# Allegro board MAIN.brd
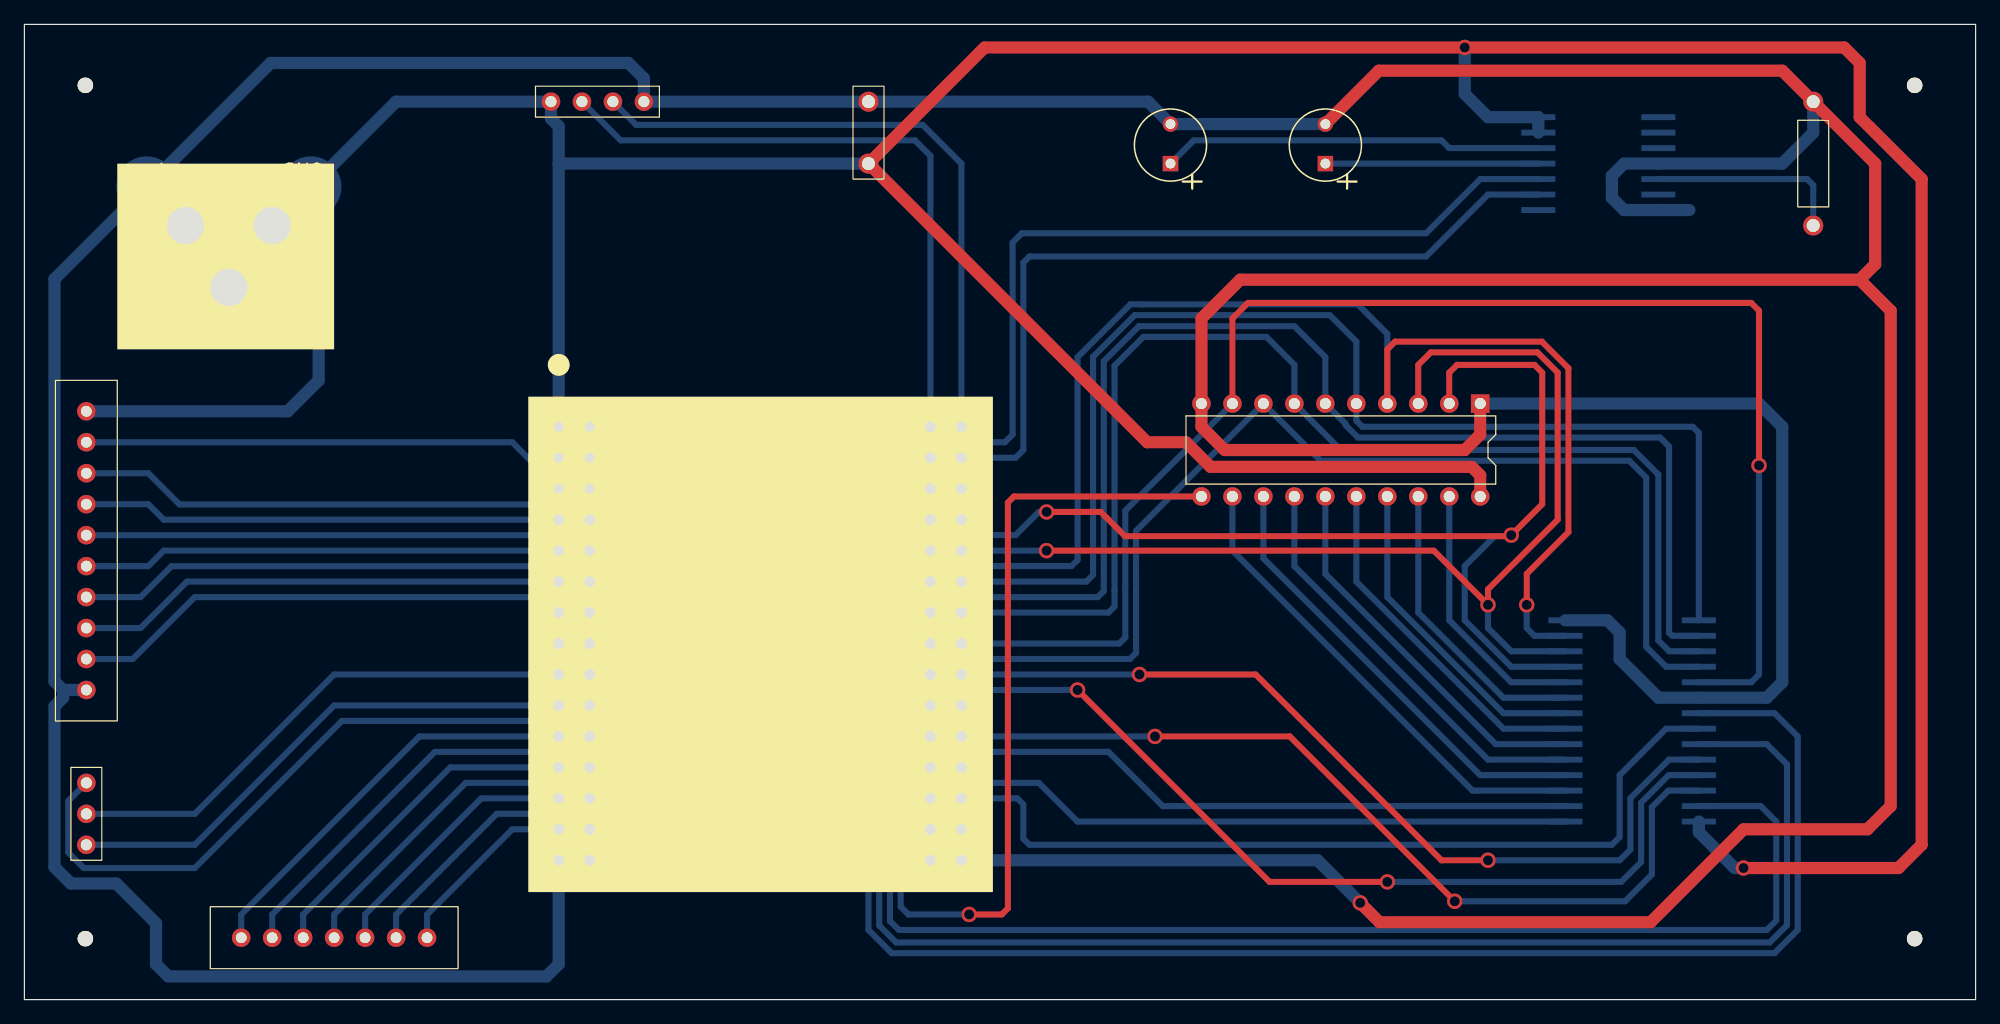
[diagram p0: board, top side]
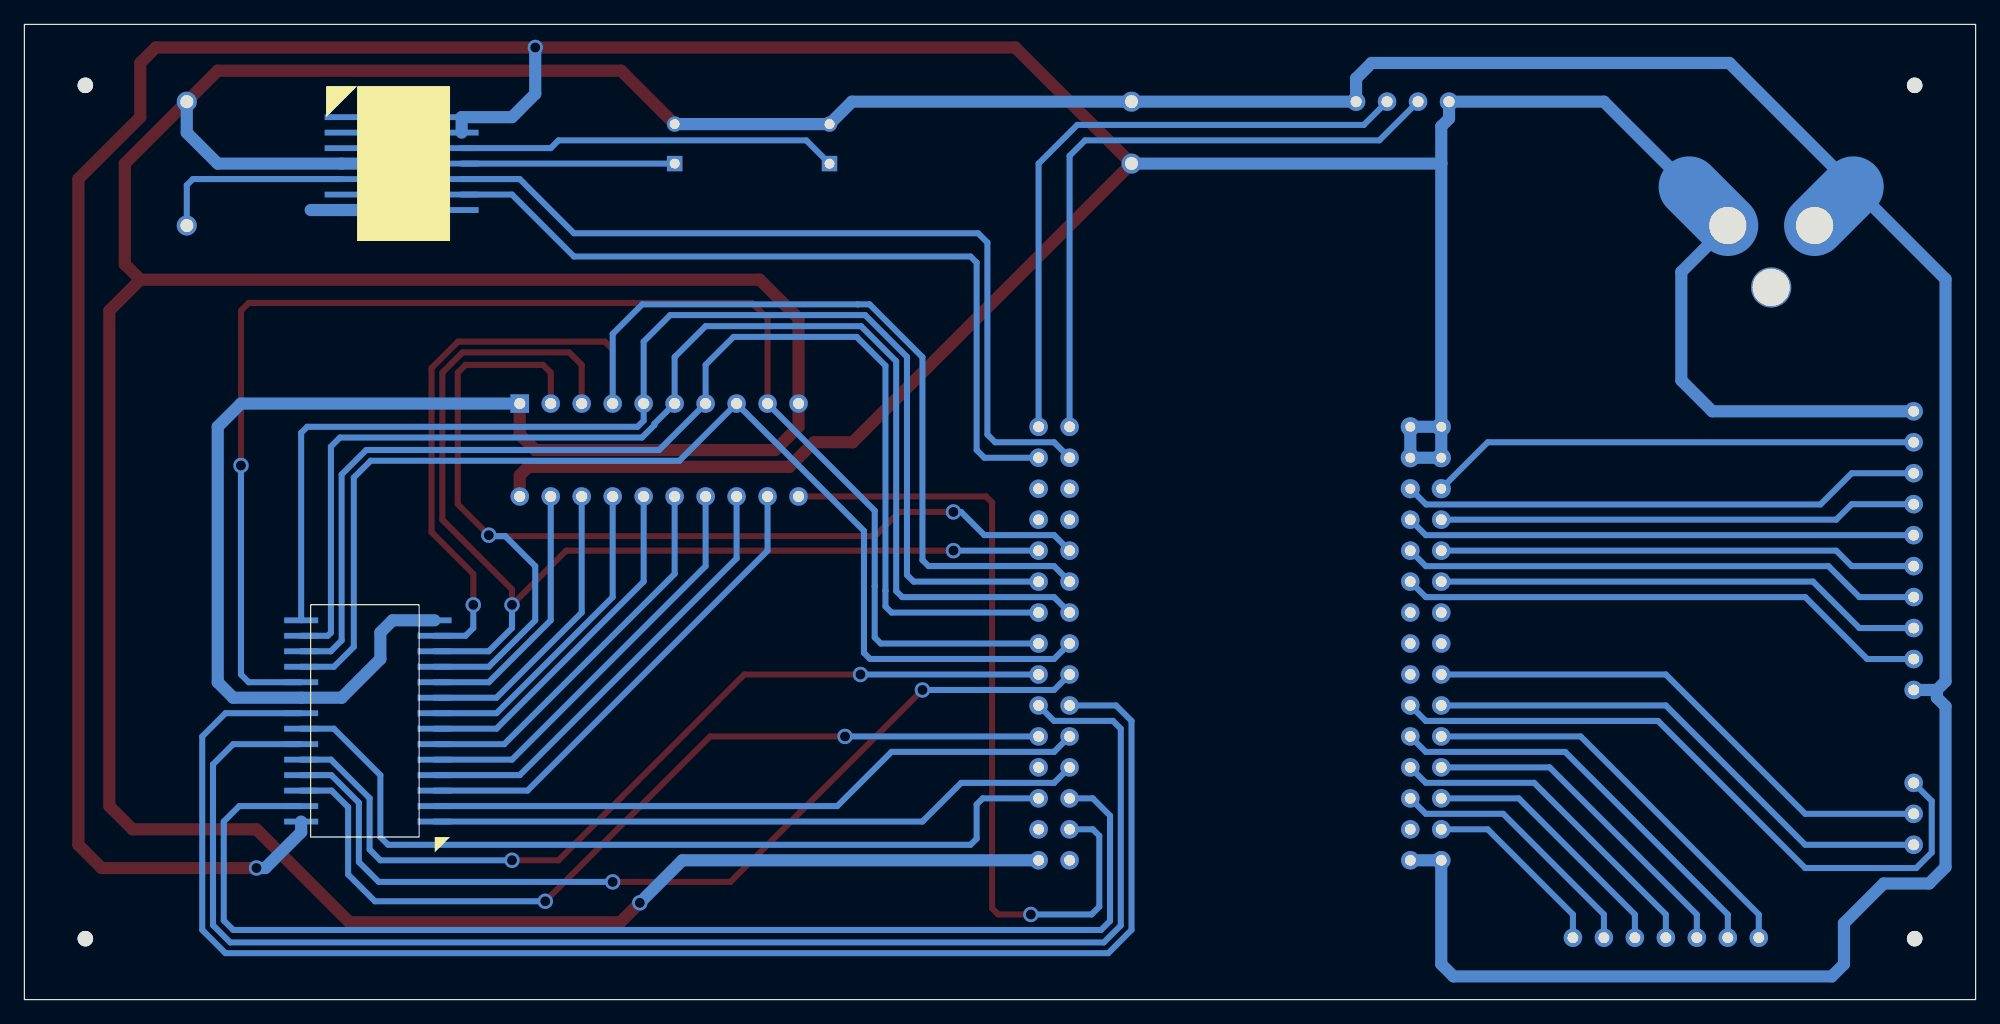
[diagram p1: board, bottom side, seen from below]

Outline 160 x 80 mm; copper layers: TOP, BOTTOM. Coordinates in mm from the lower left corner of the outline.
Outline path: rectangle 0,0 160,80

## Design rules (mm)
nets with their own width: min track width 1; nets GND VCC

## Placement (name value [footprint] x y rotation side)
C1  0.01uF  [CAPCK06]  69.22 73.66 180 top
C2  0.05uF  [CAP_POL]  106.68 68.58 90 top
C3  0.05uF  [CAP_POL]  93.98 68.58 90 top
IC1  IS62C256AL_45ULI  [SOIC127P1210X305-28N]  127.64 14.61 90 bottom
J1  CON_POWER  [CON_DC]  20.32 63.5 180 top
J2  CON_RESERVED  [JUMPER10]  5.08 48.26 270 top
J3  CON4  [JUMPER4]  43.18 73.66 0 top
J4  CON_DEVICE0  [JUMPER3]  5.08 12.7 90 top
J5  CON_LCDDATA  [JUMPER7]  17.78 5.08 0 top
NOREF  -  []  0 80 0 top
NOREF#2  -  [unnamed#2]  155 75 0 top
NOREF#3  -  []  0 0 90 top
NOREF#4  -  []  0 0 90 top
NOREF#5  -  [unnamed#2]  5 5 0 top
NOREF#6  -  [unnamed#2]  155 5 0 top
NOREF#7  -  []  155 75 0 top
NOREF#8  -  [unnamed#2]  5 75 0 top
NOREF#9  -  []  0 80 0 top
NOREF#10  -  []  5 75 90 top
R1  1.25M  [RES400]  146.69 73.66 180 top
U1  ADXL202  [QC14LD]  132.72 72.39 270 bottom
U2  -  [ATMEGA128MCU]  43.81 46.99 270 top
U3  74HC573  [DIP20_3]  119.38 48.9 270 top

## Library data of the parts
C1 = CAP NP: Tolerance: ***; User Part Number: ***
C2 C3 = CAP
IC1 = IS62C256AL_45ULI
J1 = CON2
J2 = CON10
J3 = CON4: User Part Number: ***
J4 = CON3: User Part Number: ***
J5 = CON7
R1 = RESISTOR: Tolerance: ***; User Part Number: ***
U1 = ADXL202
U2 = ATMEGA128MCU
U3 = 74HC573: Tolerance: ***; User Part Number: ***

## Footprints (pads in the part's own frame, mm; a bottom-side part is the same pattern mirrored in y, then rotated)
ATMEGA128MCU
  round 1.575 hole 0.813: 1(0,0) 2(0,2.54) 3(2.54,0) 4(2.54,2.54) 5(5.08,0) 6(5.08,2.54)
  round 1.524 hole 0.889: 7(7.62,0) 8(7.62,2.54) 9(10.16,0) 10(10.16,2.54) 11(12.7,0) 12(12.7,2.54) 13(15.24,0) 14(15.24,2.54) 15(17.78,0) 16(17.78,2.54) 17(20.32,0) 18(20.32,2.54) 19(22.86,0) 20(22.86,2.54) 21(25.4,0) 22(25.4,2.54) 23(27.94,0) 24(27.94,2.54) 25(30.48,0) 26(30.48,2.54) 27(33.02,0) 28(33.02,2.54) 29(35.56,0) 30(35.56,2.54) 31(0,30.48) 32(0,33.02) 33(2.54,30.48) 34(2.54,33.02) 35(5.08,30.48) 36(5.08,33.02) 37(7.62,30.48) 38(7.62,33.02) 39(10.16,30.48) 40(10.16,33.02) 41(12.7,30.48) 42(12.7,33.02) 43(15.24,30.48) 44(15.24,33.02) 45(17.78,30.48) 46(17.78,33.02) 47(20.32,30.48) 48(20.32,33.02) 49(22.86,30.48) 50(22.86,33.02) 51(25.4,30.48) 52(25.4,33.02) 53(27.94,30.48) 54(27.94,33.02) 55(30.48,30.48) 56(30.48,33.02) 57(33.02,30.48) 58(33.02,33.02) 59(35.56,30.48) 60(35.56,33.02)
CAP_POL
  rect 1.27x1.27 hole 0.813: 1(0,0)
  round 1.27 hole 0.813: 2(3.24,0)
CAPCK06
  round 1.651 hole 1.067: 1(0,0) 2(0,5.08)
CON_DC
  round 3.302 hole 3.048: (3.556,5.08) 1(0,0) 2(7.112,0)
DIP20_3
  rect 1.524x1.524 hole 0.914: 1(0,0)
  round 1.524 hole 0.914: 2(0,-2.54) 3(0,-5.08) 4(0,-7.62) 5(0,-10.16) 6(0,-12.7) 7(0,-15.24) 8(0,-17.78) 9(0,-20.32) 10(0,-22.86) 11(7.62,-22.86) 12(7.62,-20.32) 13(7.62,-17.78) 14(7.62,-15.24) 15(7.62,-12.7) 16(7.62,-10.16) 17(7.62,-7.62) 18(7.62,-5.08) 19(7.62,-2.54) 20(7.62,0)
JUMPER3
  round 1.524 hole 0.914: 1(0,0) 2(2.54,0) 3(5.08,0)
JUMPER4
  round 1.524 hole 0.914: 1(0,0) 2(2.54,0) 3(5.08,0) 4(7.62,0)
JUMPER7
  round 1.524 hole 0.889: 1(0,0) 2(2.54,0) 3(5.08,0) 4(7.62,0) 5(10.16,0) 6(12.7,0) 7(15.24,0)
JUMPER10
  round 1.524 hole 0.889: 1(0,0) 2(2.54,0) 3(5.08,0) 4(7.62,0) 5(10.16,0) 6(12.7,0) 7(15.24,0) 8(17.78,0) 9(20.32,0) 10(22.86,0)
QC14LD
  rect 0.483x2.794 smd: 1(0,-1.27) 2(1.27,-1.27) 3(2.54,-1.27) 4(3.81,-1.27) 5(5.08,-1.27) 6(6.35,-1.27) 7(7.62,-1.27) 8(7.62,8.57) 9(6.35,8.57) 10(5.08,8.57) 11(3.81,8.57) 12(2.54,8.57) 13(1.27,8.57) 14(0,8.57)
RES400
  round 1.651 hole 1.067: 1(0,0) 2(0,10.16)
SOIC127P1210X305-28N
  rect 0.483x2.794 smd: 1(0,-1.27) 2(1.27,-1.27) 3(2.54,-1.27) 4(3.81,-1.27) 5(5.08,-1.27) 6(6.35,-1.27) 7(7.62,-1.27) 8(8.89,-1.27) 9(10.16,-1.27) 10(11.43,-1.27) 11(12.7,-1.27) 12(13.97,-1.27) 13(15.24,-1.27) 14(16.51,-1.27) 15(16.51,9.67) 16(15.24,9.67) 17(13.97,9.67) 18(12.7,9.67) 19(11.43,9.67) 20(10.16,9.67) 21(8.89,9.67) 22(7.62,9.67) 23(6.35,9.67) 24(5.08,9.67) 25(3.81,9.67) 26(2.54,9.67) 27(1.27,9.67) 28(0,9.67)
unnamed#2
  round 1.27 hole 3.962 unplated: (0,0)

## Nets
GND: C1.1 C2.2 C3.2 IC1.14(GND) IC1.20(C\E\) J1.2 J2.10 J3.4 R1.1 U1.4(COM) U1.7(COM2) U2.29(GND0) U2.30(GND1) U2.60(GND2) U3.1(O\E\) U3.10
VCC: C1.2 IC1.28(VDD) J1.1 J2.1 J3.1 U1.13(VDD) U1.14(VDD2) U2.1(VCC0) U2.2(VCC1) U2.3(AVCC) U2.4(AREF) U3.20
A8: IC1.25(A8) U2.47(C0)
A9: IC1.24(A9) U2.48(C1)
A10: IC1.21(A10) U2.49(C2)
A11: IC1.23(A11) U2.50(C3)
A12: IC1.2(A12) U2.51(C4)
A13: IC1.26(A13) U2.52(C5)
A14: IC1.1(A14) U2.53(C6)
ACCL_X: U1.10(XOUT) U2.33(F2)
ACCL_Y: U1.9(YOUT) U2.34(F3)
DA0: IC1.11(I_O0) U2.39(A0) U3.2(D0)
DA1: IC1.12(I_O1) U2.40(A1) U3.3(D1)
DA2: IC1.13(I_O2) U2.41(A2) U3.4(D2)
DA3: IC1.15(I_O3) U2.42(A3) U3.5(D3)
DA4: IC1.16(I_O4) U2.43(A4) U3.6(D4)
DA5: IC1.17(I_O5) U2.44(A5) U3.7(D5)
DA6: IC1.18(I_O6) U2.45(A6) U3.8(D6)
DA7: IC1.19(I_O7) U2.46(A7) U3.9(D7)
FSR0: J3.2 U2.31(F0)
FSR1: J3.3 U2.32(F1)
LCDCD: J5.7 U2.27(D6)
LCDD0: J5.1 U2.21(D0)
LCDD1: J5.2 U2.22(D1)
LCDD2: J5.3 U2.23(D2)
LCDD3: J5.4 U2.24(D3)
LCDWR0: J5.5 U2.25(D4)
LCDWR1: J5.6 U2.26(D5)
OE_: IC1.22(O\E\) U2.56(G1)
SARVO: J4.1 U2.19(B6)
SPK0: J4.2 U2.17(B4)
SPK1: J4.3 U2.20(B7)
WR_: IC1.27(W\E\) U2.55(G0)
N06229: IC1.10(A0) U3.19(Q0)
N06233: IC1.9(A1) U3.18(Q1)
N06239: IC1.7(A3) U3.16(Q3)
N06243: IC1.8(A2) U3.17(Q2)
N06251: IC1.3(A7) U3.12(Q7)
N06255: IC1.5(A5) U3.14(Q5)
N06259: IC1.6(A4) U3.15(Q4)
N06263: IC1.4(A6) U3.13(Q6)
N06273: U2.57(G2) U3.11(L\E\)
N12621: J2.2 U2.5(E0)
N12677: J2.3 U2.6(E1)
N12689: J2.4 U2.7(E2)
N13066: J2.5 U2.8(E3)
N13078: J2.6 U2.9(E4)
N13592: J2.7 U2.10(E5)
N13604: J2.8 U2.11(E6)
N13619: J2.9 U2.12(E7)
N15084: C2.1 U1.11(YFILT)
N15088: C3.1 U1.12(XFILT)
N15670: R1.2 U1.5(T2)

Pads without a net: U1 1 2 3 6 8; U2 13 14 15 16 18 28 35 36 37 38 54 58 59

## Via types
v1: diameter 1.27, hole 0.813, TOP to BOTTOM, 16 vias

## Routing (per net, layer and track width the routed paths; a pad name or vN(x,y) marks a point on that pad's centre or on a via; arc(x,y) is an arc through that point)
GND: length 603.8
  TOP w1: C2.2 111.06,76.2 144.15,76.2 R1.1 151.76,68.58 151.76,60.33 150.5,59.05 ; 150.5,59.05 153.03,56.52 153.03,15.88 151.13,13.97 140.97,13.97 133.35,6.35 111.12,6.35 v1(109.54,7.94) ; 150.5,59.05 99.69,59.05 96.52,55.88 U3.10 96.52,46.99 98.42,45.09 118.11,45.09 119.38,46.35 U3.1
  BOTTOM w1: R1.1 146.69,71.12 144.15,68.58 U1.4 131.18,68.58 130.18,67.58 130.18,65.77 131.18,64.77 U1.7 136.53,64.77 ; U3.1 142.24,48.9 144.15,46.99 144.15,26.04 142.88,24.77 IC1.20 133.99,24.77 130.81,27.94 130.81,30.11 129.81,31.11 126.36,31.11 ; 3.17,25.4 J2.10 ; 3.17,25.4 3.17,24.77 2.47,24.06 2.47,10.87 3.81,9.53 7.53,9.53 10.79,6.26 10.79,2.9 11.79,1.91 42.81,1.91 43.81,2.9 U2.29 U2.30 ; 3.17,25.4 2.47,26.11 2.47,59.11 20.19,76.83 49.53,76.83 50.8,75.56 J3.4 C1.1 92.14,73.66 C3.2 C2.2 ; U2.60 106.05,11.43 v1(109.54,7.94)
  BOTTOM w5: J1.2 10.03,66.67
VCC: length 371.5
  TOP w1: U3.20 119.38,43.01 118.68,43.7 97.27,43.7 95.25,45.72 92.08,45.72 C1.2 78.74,78.11 v1(118.11,78.11) 149.22,78.11 150.5,76.83 150.5,72.39 155.57,67.31 155.57,12.7 153.67,10.79 v1(140.97,10.79)
  BOTTOM w1: C1.2 43.81,68.58 ; 43.81,68.58 43.81,71.64 43.18,72.27 J3.1 30.48,73.66 23.5,66.67 ; 43.81,68.58 U2.1 ; J1.1 24.13,59.69 24.13,50.8 21.59,48.26 J2.1 ; U2.1 U2.2 U2.4 U2.3 U2.1 ; v1(140.97,10.79) 140.25,10.79 137.31,13.73 IC1.28 ; 124.14,71.12 124.14,72.39 120.02,72.39 118.11,74.3 v1(118.11,78.11)
  BOTTOM w5: 23.5,66.67 J1.1
A8: length 76.5
  TOP w0.5: v1(111.76,9.66) 102.1,9.66 v1(86.36,25.4)
  BOTTOM w0.5: IC1.25 134.83,18.41 132.57,16.16 132.57,11.29 130.94,9.66 v1(111.76,9.66) ; v1(86.36,25.4) 75.56,25.4 U2.47
A9: length 72.7
  TOP w0.5: v1(120.02,11.43) 116.2,11.43 100.97,26.67 v1(91.44,26.67)
  BOTTOM w0.5: U2.48 v1(91.44,26.67) ; 137.31,19.68 134.86,19.68 131.69,16.52 131.69,12.31 130.81,11.43 v1(120.02,11.43)
A10: length 125.3
  BOTTOM w0.5: U2.49 70.48,24.13 69.22,22.86 69.22,5.71 71.12,3.81 143.51,3.81 145.41,5.71 145.41,21.59 143.51,23.5 IC1.21
A11: length 120.4
  BOTTOM w0.5: U2.50 75.57,22.86 70.73,22.86 70.1,22.23 70.1,6.08 71.48,4.69 143.12,4.69 144.53,6.1 144.53,19.3 142.88,20.95 IC1.23
A12: length 54.4
  BOTTOM w0.5: U2.51 75.56,20.32 88.9,20.32 93.34,15.88 126.36,15.88
A13: length 73.1
  TOP w0.5: v1(92.71,21.59) 103.77,21.59 v1(117.29,8.07)
  BOTTOM w0.5: IC1.26 134.81,17.14 133.45,15.79 133.45,10.26 131.26,8.07 v1(117.29,8.07) ; U2.52 v1(92.71,21.59)
A14: length 53.9
  BOTTOM w0.5: U2.53 75.56,17.78 83.19,17.78 86.36,14.61 126.36,14.61
ACCL_X: length 68.5
  BOTTOM w0.5: U2.33 75.56,45.72 80.4,45.72 81.03,46.35 81.03,62.11 81.79,62.87 114.94,62.87 119.38,67.31 124.14,67.31
ACCL_Y: length 65.3
  BOTTOM w0.5: U2.34 81.28,44.45 81.92,45.09 81.92,60.46 82.42,60.96 114.94,60.96 120.02,66.04 124.14,66.04
DA0: length 94
  TOP w0.5: v1(83.82,40.01) 88.26,40.01 90.25,38.02 121.84,38.02 v1(121.92,38.1) 124.46,40.64 124.46,51.44 123.83,52.07 117.47,52.07 116.84,51.44 U3.2
  BOTTOM w0.5: U2.39 75.57,38.1 81.28,38.1 83.18,40.01 v1(83.82,40.01) ; 126.36,27.3 121.92,27.3 118.11,31.11 118.11,35.56 120.57,38.02 121.84,38.02 v1(121.92,38.1)
DA1: length 91.2
  TOP w0.5: v1(83.82,36.83) 115.57,36.83 v1(120.02,32.38) 120.02,33.66 125.73,39.37 125.73,51.44 124.07,53.09 115.32,53.09 114.3,52.07 U3.3
  BOTTOM w0.5: 126.36,28.57 121.92,28.57 120.02,30.48 v1(120.02,32.38) ; U2.40 v1(83.82,36.83)
DA2: length 110
  TOP w0.5: U3.4 111.76,53.34 112.39,53.98 124.44,53.98 126.61,51.8 126.61,38.35 123.19,34.92 v1(123.19,32.38)
  BOTTOM w0.5: 126.36,29.84 123.83,29.84 123.19,30.48 v1(123.19,32.38) ; U2.41 75.57,35.56 85.86,35.56 86.36,36.06 86.36,52.7 90.69,57.03 91.67,57.03 91.67,57.03 109.34,57.03 111.76,54.61 U3.4
DA3: length 103.2
  BOTTOM w0.5: U2.42 87.08,34.29 87.63,34.84 87.63,52.73 91.05,56.15 107.04,56.15 109.22,53.98 U3.5 109.22,47.49 109.72,46.99 136.81,46.99 137.31,46.49 IC1.15
DA4: length 105.5
  BOTTOM w0.5: IC1.16 135.12,29.84 134.87,30.1 134.87,45.36 134.12,46.11 109.36,46.11 108.34,47.13 108.34,47.24 U3.6 106.68,52.7 104.14,55.24 91.39,55.24 88.51,52.36 88.51,33.52 88.01,33.02 75.56,33.02 U2.43
DA5: length 101.9
  BOTTOM w0.5: U2.44 88.89,31.75 89.39,32.25 89.39,33.55 89.39,33.55 89.39,52 91.76,54.36 101.85,54.36 104.14,52.07 U3.7 107.95,45.09 131.97,45.09 133.99,43.07 133.99,29.46 134.87,28.57 IC1.17
DA6: length 95.2
  BOTTOM w0.5: IC1.18 134.62,27.3 132.99,28.94 132.99,42.82 131.6,44.2 106.29,44.2 U3.8 91.15,38.45 91.15,35.01 91.16,35 91.16,34.27 91.16,34.27 91.16,28.44 90.66,27.94 75.56,27.94 U2.45
DA7: length 122.5
  TOP w0.5: v1(142.24,43.81) 142.24,56.52 141.6,57.15 100.33,57.15 99.06,55.88 U3.9
  BOTTOM w0.5: U2.46 89.78,29.21 90.28,29.71 90.28,33.91 90.27,33.91 90.27,40.11 U3.9 ; IC1.19 141.6,26.04 142.24,26.67 v1(142.24,43.81)
FSR0: length 52.6
  BOTTOM w0.5: J3.2 48.9,70.48 73.03,70.48 74.3,69.22 U2.31
FSR1: length 52.3
  BOTTOM w0.5: J3.3 50.16,71.75 73.66,71.75 76.83,68.58 U2.32
LCDCD: length 15.6
  BOTTOM w0.5: J5.7 33.02,6.98 40.01,13.97 U2.27
LCDD0: length 34
  BOTTOM w0.5: U2.21 32.39,21.59 17.78,6.98 J5.1
LCDD1: length 34
  BOTTOM w0.5: U2.22 45.09,20.32 33.66,20.32 20.32,6.98 J5.2
LCDD2: length 27.9
  BOTTOM w0.5: J5.3 22.86,6.98 34.93,19.05 U2.23
LCDD3: length 27.9
  BOTTOM w0.5: J5.4 25.4,6.98 36.2,17.78 45.09,17.78 U2.24
LCDWR0: length 21.7
  BOTTOM w0.5: U2.25 37.47,16.51 27.94,6.98 J5.5
LCDWR1: length 21.7
  BOTTOM w0.5: U2.26 45.09,15.24 38.74,15.24 30.48,6.98 J5.6
OE_: length 70.6
  BOTTOM w0.5: IC1.22 134.62,22.23 130.81,18.41 130.81,13.34 130.17,12.7 82.42,12.7 81.92,13.2 81.92,16.01 81.42,16.51 U2.56
SARVO: length 43.5
  BOTTOM w0.5: J4.1 13.97,12.7 25.4,24.13 U2.19
SPK0: length 43.5
  BOTTOM w0.5: U2.17 25.4,26.67 13.97,15.24 J4.2
SPK1: length 55.1
  BOTTOM w0.5: U2.20 45.09,22.86 26.04,22.86 13.97,10.79 4.87,10.79 3.6,12.06 3.6,16.3 J4.3
WR_: length 100.8
  BOTTOM w0.5: U2.55 72.39,16.51 70.98,15.1 70.98,6.45 71.71,5.71 142.88,5.71 143.65,6.49 143.65,14.61 142.38,15.88 IC1.27
N06229: length 21.8
  BOTTOM w0.5: 126.36,26.04 121.92,26.04 116.84,31.11 U3.19
N06233: length 24.5
  BOTTOM w0.5: 126.36,24.77 121.28,24.77 114.3,31.75 U3.18
N06239: length 29.1
  BOTTOM w0.5: U3.16 109.22,34.29 121.29,22.23 126.36,22.23
N06243: length 26.8
  BOTTOM w0.5: 126.36,23.5 121.29,23.5 111.76,33.02 U3.17
N06251: length 39.9
  BOTTOM w0.5: U3.12 99.06,36.83 118.74,17.14 126.36,17.14
N06255: length 34.5
  BOTTOM w0.5: U3.14 104.14,35.56 120.02,19.68 126.36,19.68
N06259: length 31.8
  BOTTOM w0.5: U3.15 106.68,34.92 120.65,20.95 126.36,20.95
N06263: length 37.2
  BOTTOM w0.5: 126.36,18.41 119.38,18.41 101.6,36.2 U3.13
N06273: length 67.1
  TOP w0.5: U3.11 81.14,41.27 80.64,40.77 80.64,7.49 80.14,6.99 v1(77.47,6.99)
  BOTTOM w0.5: v1(77.47,6.99) 72.49,6.99 71.86,7.62 71.86,13.44 72.39,13.97 U2.57
N12621: length 40.3
  BOTTOM w0.5: J2.2 40.01,45.72 U2.5
N12677: length 42.9
  BOTTOM w0.5: J2.3 10.16,43.18 12.72,40.62 45.06,40.62 U2.6
N12689: length 39.3
  BOTTOM w0.5: J2.4 10.16,40.64 11.43,39.37 U2.7
N13066: length 41.8
  BOTTOM w0.5: J2.5 45.09,38.1 U2.8
N13078: length 39.3
  BOTTOM w0.5: U2.9 11.43,36.83 10.16,35.56 J2.6
N13592: length 42.9
  BOTTOM w0.5: J2.7 9.52,33.02 12.06,35.56 45.08,35.56 U2.10
N13604: length 40.3
  BOTTOM w0.5: J2.8 9.52,30.48 13.33,34.29 U2.11
N13619: length 43.9
  BOTTOM w0.5: U2.12 45.08,33.02 13.97,33.02 8.89,27.94 J2.9
N15084: length 17.5
  BOTTOM w0.5: C2.1 124.14,68.58
N15088: length 31.2
  BOTTOM w0.5: C3.1 95.89,70.48 116.2,70.48 116.84,69.85 124.14,69.85
N15670: length 16.2
  BOTTOM w0.5: R1.2 146.69,66.81 146.19,67.31 U1.5

## Text on the board
DIMENSION: FIGURE | SIZE | 0.813 | 0.889 | 0.914 | 1.067 | 3.048 | 3.962 | DRILL CHART: TOP to BOTTOM | ALL UNITS ARE IN MILLIMETERS | PLATED | NON-PLATED | QTY | 6 | 20 | 71 | 27 | 4 | 3
